# Altium PCB USV-Central Controller Board.PcbDoc (part 2 of 2)
Units mm, origin at the board's own origin, x right, y up, seen from the top; angles counter-clockwise.
Board outline 150 x 100 mm, 2 copper layers (Top Layer, Bottom Layer); 99 components, 79 nets, 371 pads, 0 vias.
Unrouted connection lines stored in the file: 190.
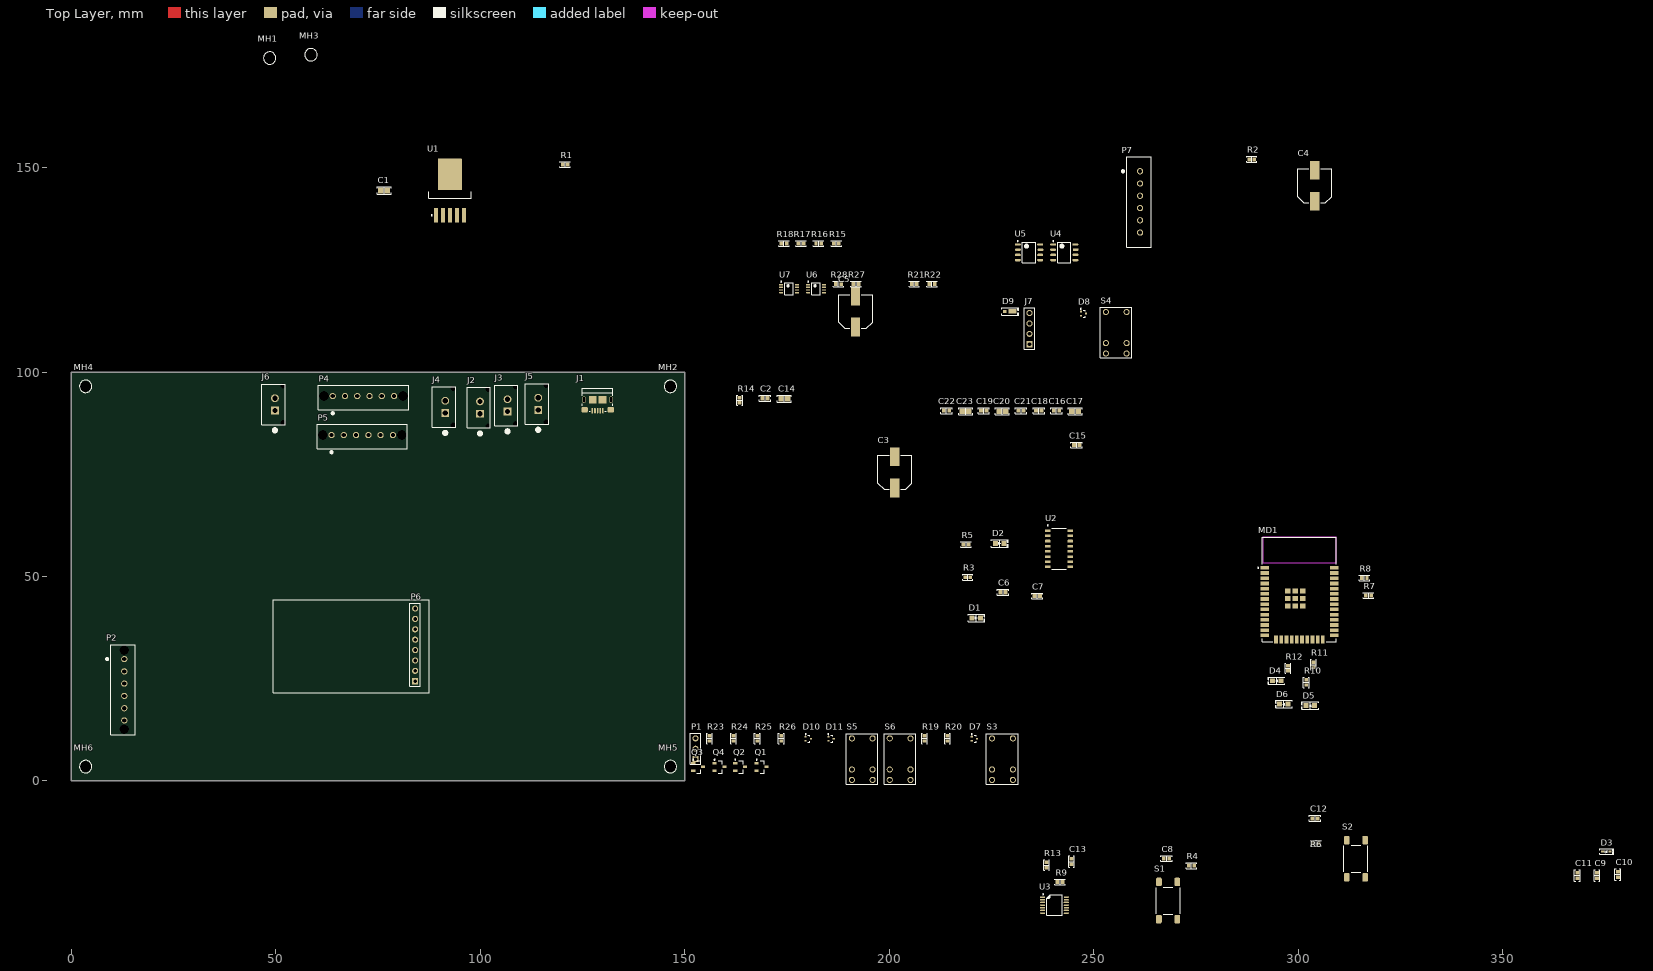
[diagram p0: Top Layer view]

## Nets (pads, with @x,y where several pads share a name; then routed paths per layer and width w, separated by ;. In a path a pad name is that pad's centre, name@x,y a point inside that pad or via, vN(x,y) a via of type N, cw(c..) or ccw(c..) an arc to the next point about the centre after c; other vN are vias at no path point) (continued)
RC_PWM_RUD: P1.2 S5.1 S6.1
RED_INT: MD1.22 R11.1
RX0: D1.2 MD1.35 U2.3
RX_BUG: J7.3 U6.1
RX_GPS: P7.4 U6.2
TX0: D2.2 MD1.34 U2.2
TX_BUG: J7.2 U7.1
TX_GPS: P7.3 U7.2
pads on no net: C15.1 C16.1 C19.2 C22.2 D7.2 D7.3 D8.2 D8.3 D10.2 D10.3 D11.2 D11.3 J1.4 J2.25 J3.25 J4.25 J5.25 J6.25 MD1.4 MD1.5 MD1.6 MD1.7 MD1.18 MD1.19 MD1.20 MD1.23 MD1.31 MD1.32 MH1.0 MH2.0 MH3.0 MH4.0 MH5.0 MH6.0 P2.2 P2.3 P2.30 P4.2 P4.30 P5.2 P5.3 P5.30 P6.5 P6.6 P6.7 P6.8 P7.30 R19.2 R21.2 R23.2 R25.2 R27.1 R28.1 S3.5 S4.5 S5.5 S6.5 U2.4 U2.7 U2.8 U2.9 U2.10 U2.11 U2.12 U2.15 U3.2 U3.3 U3.8 U3.9 U3.11 U3.12 U4.5 U4.8 U5.5 U5.8 U6.3 U6.7 U7.3 U7.7

## Silkscreen, mask and mechanical layers (free items; w line width, h text height)
Top Overlay:
  lines w0.254: 49.403,21.59 87.503,21.59 87.503,44.323 49.403,44.323 49.403,21.59

## Dimensions
3.5,96.5 to 35.687,99.441 on Multi-Layer